# Altium PCB Main_board.PcbDoc (part 1 of 2)
Units mm, origin at the board's own origin, x right, y up, seen from the top; angles counter-clockwise.
Board outline 234.31 x 121 mm, 2 copper layers (Top Layer, Bottom Layer); 208 components, 182 nets, 717 pads, 564 vias.
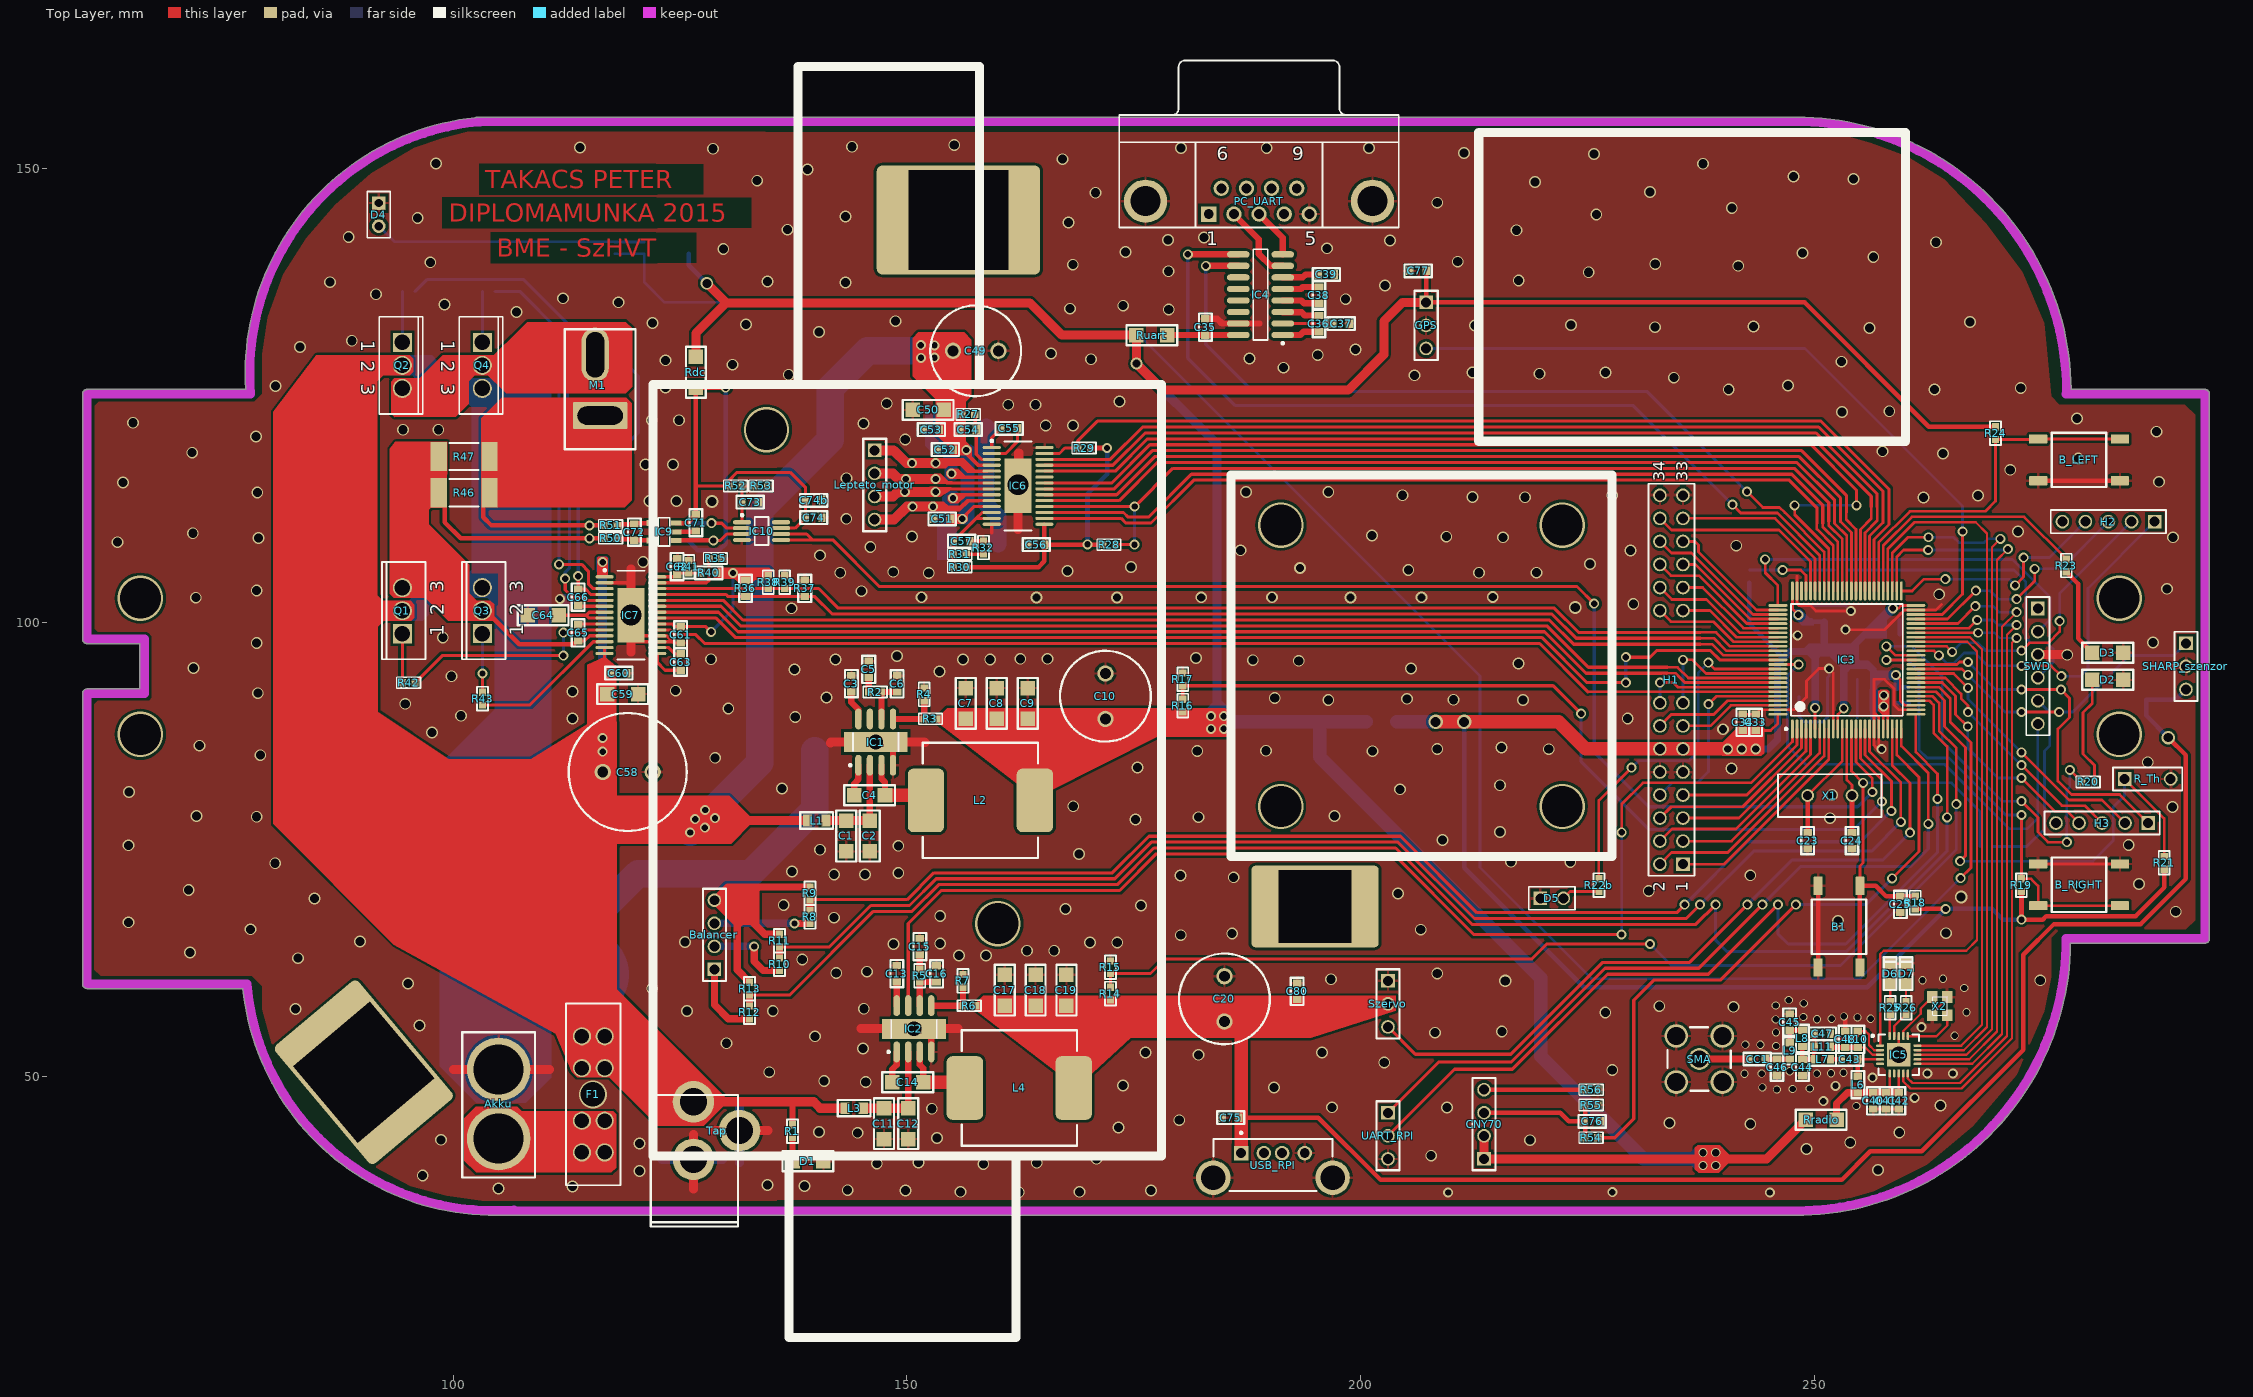
[diagram p0: Top Layer view]
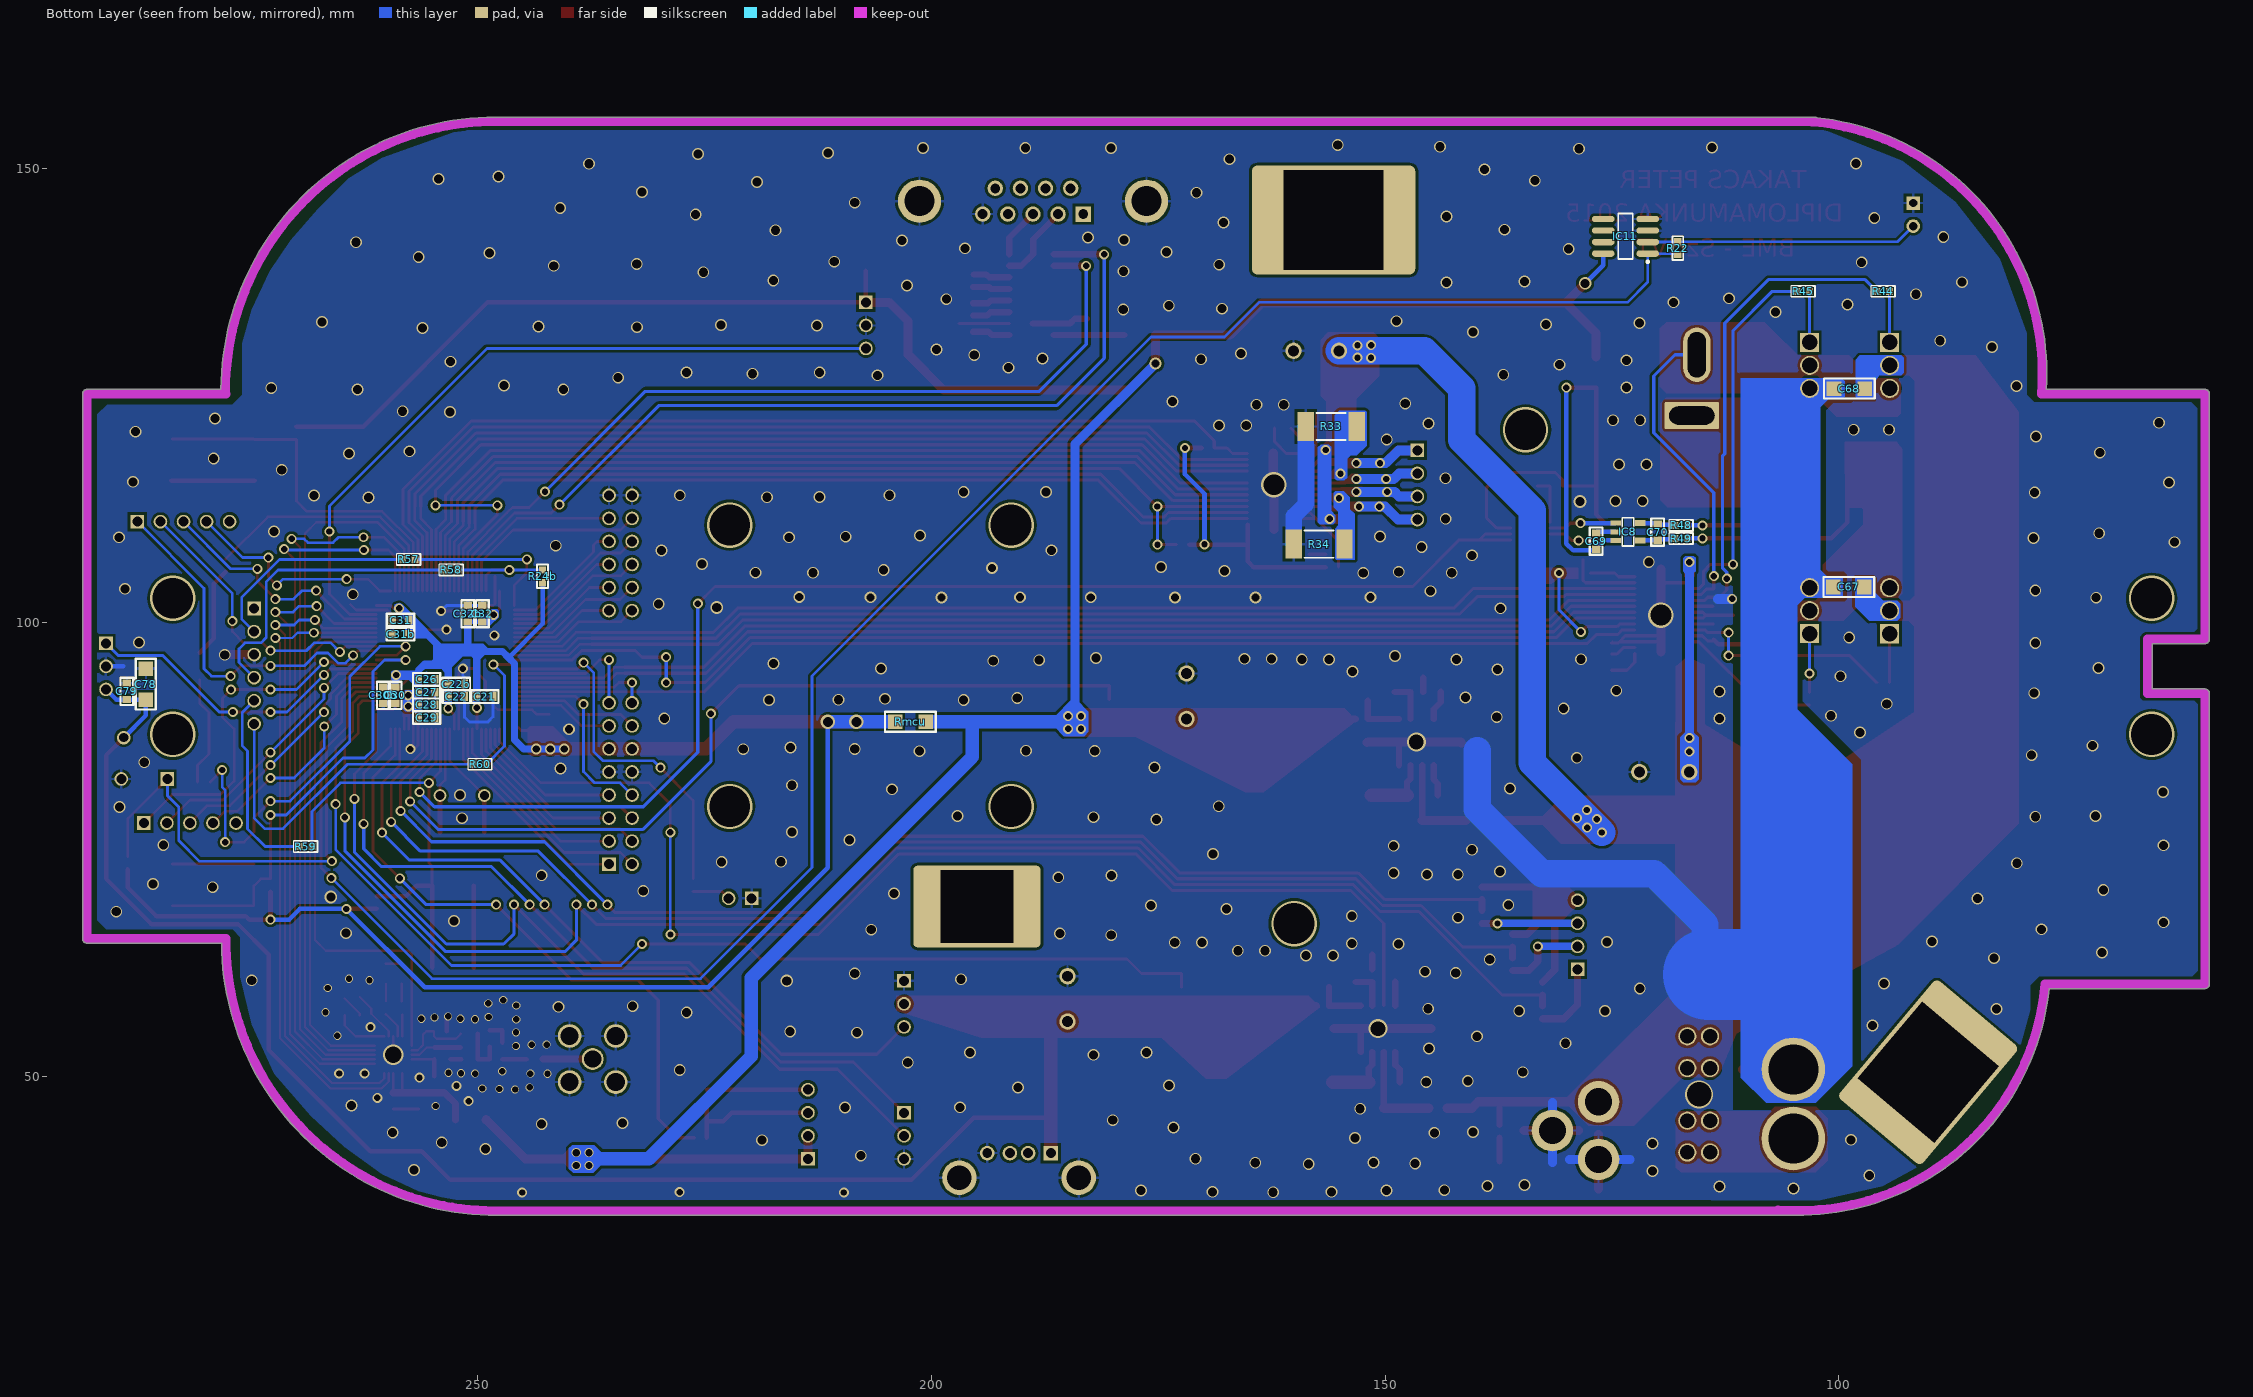
[diagram p1: Bottom Layer view, seen from below]

## Layer stack, top to bottom
Top Solder: solder mask 0.0102, Solder Resist, Dk 3.5
Top Layer: signal copper 0.0356
Dielectric1: dielectric 0.32, FR-4, Dk 4.8
Bottom Layer: signal copper 0.0356
Bottom Solder: solder mask 0.0102, Solder Resist, Dk 3.5

## Board outline
59.686,59.707 cw(c59.686,60.207) 59.186,60.207 59.186,92.207 cw(c59.686,92.207) 59.686,92.707 65.5,92.707 65.5,97.707 59.686,97.707 cw(c59.686,98.207) 59.186,98.207 59.186,125.207 cw(c59.686,125.207) 59.686,125.707 77.171,125.707 cw(c105.417,127.497) 102.44,155.643 cw(c102.686,155.207) 102.686,155.707 248.023,155.707 cw(c248.023,125.472) 278.258,125.707 293,125.707 cw(c293,125.207) 293.5,125.207 293.5,65.207 cw(c293,65.207) 293,64.707 278.187,64.707 cw(c247.953,64.95) 248.744,34.725 cw(c248.61,35.207) 248.61,34.707 105,34.707 cw(c105,35.207) 104.824,34.739 cw(c104.497,62.537) 76.841,59.707

## Design rules (kind name [scope] priority, off if disabled: settings)
Clearance [All] p1: gap=0.3
Height [All] p1: minheight=0 maxheight=100 prefheight=12.7
PolygonConnect [IsVia AND InNet('GND')] p1: connectstyle=Direct reliefconductorwidth=0.3 reliefentries=4 polygonreliefangle="90 Angle" airgapwidth=0.3
PolygonConnect PolygonConnect_1 [All] p2: connectstyle=Relief reliefconductorwidth=0.3 reliefentries=4 polygonreliefangle="90 Angle" airgapwidth=0.3
RoutingVias [All] p1: holewidth=1 width=1.5 viastyle="Through Hole" minholewidth=0.7 minwidth=0.9 maxholewidth=100 maxwidth=110
SolderMaskExpansion [All] p1: expansion=0.102
Width [All] p1: maxlimit=100 minlimit=0.25 preferedwidth=0.254 minimp=50.000000 maximp=50.000000 favimp=50.000000
29 further rules are at their usual default settings.

## Classes and differential pairs
component class U_tapellatas: Akku Balancer C1 C2 C3 C4 C5 C6 C7 C8 C9 C10 C11 C12 C13 C14 C15 C16 C17 C18 C19 C20 D1 F1 IC1 IC2 L1 L2 L3 L4 R1 R2 R3 R4 R5 R6 R7 R8 R9 R10 R11 R12 R13 R14 R15 R16 R17 Rdc Rmcu Rradio Ruart Tap
component class U_Si4461: C44 C45 C46 C47 C48 C49 C50 C51 C52 CC1 D6 D7 IC6 L5 L6 L7 L8 L9 L10 R27 R30 SMA X2
component class U_PC_UART: C39 C41 C42 C43 C44 IC6 PC_UART
component class U_mikrokontroller: B1 B_LEFT B_RIGHT C21 C22 C23 C24 C26 C27 C28 C29 C30 C30b C31 C31b C32 C32b C33 C34 D2 D3 D4 D5 H1 H2 H3 IC3 IC11 R18 R19 R20 R21 R22 R22b R23 R24 R24b R_Th X1
component class U_lepteto_motor: C53 C54 C55 C56 C57 C58 C59 C60 C65 IC7 Lepteto_motor R29 R30 R31 R32 R33 R34 R35 R38
component class U_DC_motor: C58 C59 C60 C61 C62 C63 C64 C65 C66 C67 C68 C69 C70 C71 C72 C73 IC7 IC8 IC9 IC10 M1 Q1 Q2 Q3 Q4 R35 R36 R37 R38 R39 R40 R41 R42 R43 R44 R45 R46 R47 R48 R49 R50 R51 R52 R53
component class U_csatlakozok: C78 C79 C80 C81 C82 C85 CNY70 GPS R56 R57 R58 R59 R60 R61 R62 SHARP_szenzor SWD Szervo UART_RPI USB_RPI

## Components (designator, comment, footprint, x,y, rotation, side; value= is the part's Value field where it differs from the comment)
Akku "XT60" XT60 105.16,47.12 r0 top
B1 "SW-PB" "6x6 button" 252.69,66.52 r0 top
B_LEFT "SW-PB" "6x6 button" 279.13,117.944 r90 top
B_RIGHT "SW-PB" "6x6 button" 279.13,71.13 r270 top
Balancer "Balancer csatlakozó" FP_CONN4_TUSKE_254MM 128.8,61.81 r0 top
C1 "0805" FP_1206_CAP_125 143.33,76.51 r270 top
C2 "Cap" FP_1206_CAP_125 145.92,76.51 r270 top
C3 "Cap" FP_0603_CAP_080 143.89,93.29 r90 top
C4 "Cap" FP_1206_CAP_125 145.89,81 r0 top
C5 "" FP_0603_CAP_080 145.8,94.86 r90 top
C6 "" FP_0603_CAP_080 148.93,93.27 r90 top
C7 "6.3V" FP_1206_CAP_125 156.489,91.11 r90 top
C8 "6.3V" FP_1206_CAP_125 159.909,91.11 r90 top
C9 "Cap" FP_1206_CAP_125 163.32,91.11 r90 top
C10 "16V" power_cap_10mm 171.25,92.06 r0 top
C11 "0805" FP_1206_CAP_125 147.48,44.82 r270 top
C12 "Cap" FP_1206_CAP_125 150.15,44.82 r270 top
C13 "Cap" FP_0603_CAP_080 148.89,61.35 r90 top
C14 "Cap" FP_1206_CAP_125 150.09,49.38 r0 top
C15 "" FP_0603_CAP_080 151.42,64.33 r90 top
C16 "" FP_0603_CAP_080 153.27,61.32 r90 top
C17 "6.3V" FP_1206_CAP_125 160.78,59.53 r90 top
C18 "6.3V" FP_1206_CAP_125 164.18,59.53 r90 top
C19 "Cap" FP_1206_CAP_125 167.58,59.53 r90 top
C20 "16V" power_cap_10mm 184.36,58.71 r0 top
C21 "Cap" FP_0603_CAP_080 249.17,91.87 r180 bottom
C22 "Cap" FP_0603_CAP_080 252.32,91.87 r180 bottom
C22b "Cap" FP_0603_CAP_080 252.32,93.25 r180 bottom
C23 "Cap" FP_0603_CAP_080 249.237,76 r90 top
C24 "Cap" FP_0603_CAP_080 254.117,76 r90 top
C25 "Cap" FP_0603_CAP_080 259.44,68.97 r90 top
C26 "Cap" FP_0603_CAP_080 255.6,93.76 r0 bottom
C27 "Cap" FP_0603_CAP_080 255.6,92.36 r0 bottom
C28 "Cap" FP_0603_CAP_080 255.6,90.96 r0 bottom
C29 "Cap" FP_0603_CAP_080 255.6,89.56 r0 bottom
C30 "Cap" FP_0603_CAP_080 259.07,92.01 r270 bottom
C30b "Cap" FP_0603_CAP_080 260.36,92.01 r270 bottom
C31 "Cap" FP_0603_CAP_080 258.47,100.3 r0 bottom
C31b "Cap" FP_0603_CAP_080 258.47,98.75 r0 bottom
C32 "Cap" FP_0603_CAP_080 249.45,100.99 r90 bottom
C32b "Cap" FP_0603_CAP_080 251.06,100.99 r90 bottom
C33 "Cap" FP_0603_CAP_080 243.5,89.02 r90 top
C34 "Cap" FP_0603_CAP_080 242.1,89.02 r270 top
C35 "Cap" FP_0603_CAP_080 182.88,132.58 r270 top
C36 "Cap" FP_0603_CAP_080 195.4,132.95 r270 top
C37 "Cap" FP_0603_CAP_080 197.84,132.96 r180 top
C38 "Cap" FP_0603_CAP_080 195.4,136.09 r270 top
C39 "Cap" FP_0603_CAP_080 196.21,138.37 r180 top
C40 "Cap" FP_0603_CAP_080 256.469,47.33 r90 top
C41 "Cap" FP_0603_CAP_080 257.869,47.33 r90 top
C42 "Cap" FP_0603_CAP_080 259.269,47.33 r90 top
C43 "Cap" FP_0603_CAP_080 253.86,51.91 r180 top
C44 "Cap" FP_0603_CAP_080 248.66,51.01 r270 top
C45 "Cap" FP_0603_CAP_080 247.26,56.01 r90 top
C46 "Cap" FP_0603_CAP_080 245.86,51.04 r270 top
C47 "Cap" FP_0603_CAP_080 250.86,54.71 r0 top
C48 "Cap" FP_0603_CAP_080 253.37,54.11 r270 top
C49 "16V" power_cap_10mm 157.73,130.58 r270 top
C50 "50V" FP_1206_CAP_125 152.34,123.45 r0 top
C51 "50V" FP_0603_CAP_080 153.875,111.44 r0 top
C52 "50V" FP_0603_CAP_080 154.24,119.07 r0 top
C53 "50V" FP_0603_CAP_080 152.69,121.28 r0 top
C54 "16V" FP_0603_CAP_080 156.74,121.29 r180 top
C55 "50V" FP_0603_CAP_080 161.27,121.42 r180 top
C56 "50V" FP_0603_CAP_080 164.25,108.61 r0 top
C57 "50V" FP_0603_CAP_080 156.03,108.99 r180 top
C58 "25V" power_cap_13mm 119.39,83.13 r0 top
C59 "Cap" FP_1206_CAP_125 118.69,92.14 r180 top
C60 "Cap" FP_0603_CAP_080 118.27,94.44 r180 top
C61 "Cap" FP_0603_CAP_080 125.074,98.671 r90 top
C62 "Cap" FP_0603_CAP_080 124.7,106.186 r270 top
C63 "Cap" FP_0603_CAP_080 125.074,95.676 r270 top
C64 "Cap" FP_1206_CAP_125 109.93,100.83 r0 top
C65 "Cap" FP_0603_CAP_080 113.79,98.89 r270 top
C66 "Cap" FP_0603_CAP_080 113.79,102.83 r90 top
C67 "Cap" FP_1206_CAP_125 98.91,103.94 r0 bottom
C68 "Cap" FP_1206_CAP_125 98.85,125.8 r0 bottom
C69 "Cap" FP_0603_CAP_080 126.76,108.99 r270 bottom
C70 "Cap" FP_0603_CAP_080 119.98,109.99 r90 bottom
C71 "Cap" FP_0603_CAP_080 126.76,111.02 r90 top
C72 "Cap" FP_0603_CAP_080 119.98,109.99 r270 top
C73 "Cap" FP_0603_CAP_080 132.74,113.28 r180 top
C74 "Cap" FP_0603_CAP_080 139.74,111.58 r0 top
C74b "Cap" FP_0603_CAP_080 139.74,113.47 r0 top
C75 "Cap" FP_0603_CAP_080 185.68,45.48 r0 top
C76 "Cap" FP_0603_CAP_080 225.49,45.08 r180 top
C77 "Cap" FP_0603_CAP_080 206.31,138.76 r180 top
C78 "Cap" FP_1206_CAP_125 286.52,93.24 r270 bottom
C79 "Cap" FP_0603_CAP_080 288.61,92.44 r90 bottom
C80 "Cap" FP_0603_CAP_080 193,59.39 r90 top
CC1 "Cap" FP_0603_CAP_080 243.66,51.94 r0 top
CNY70 "Tüskesor" FP_CONN4_TUSKE_254MM 213.58,40.94 r0 top
D1 "GREEN" FP_1206_CAP_160 139.1,40.67 r0 top
D2 "RED" FP_1206_CAP_085 282.3,93.707 r0 top
D3 "BLUE" FP_1206_CAP_085 282.3,96.707 r0 top
D4 "Photo Sensor" HDR1X2#1 91.82,146.23 r270 top
D5 "WhiteLED" HDR1X2#2 219.78,69.65 r0 top
D6 "GREEN" FP_0805_LED_GREEN 258.32,60.35 r90 top
D7 "ORANGE" FP_0805_LED_GREEN 260.08,60.35 r90 top
F1 "Fuse" autosarus_foglalat 115.29,47.91 r90 top
GPS "Tüskesor" FP_CONN3_TUSKE_254MM 207.2,135.3 r180 top
H1 "Header 17X2" HDR2X17 235.5,73.4 r90 top
H2 "Header 5" HDR1X5 287.45,111.137 r180 top
H3 "Header 5" HDR1X5 286.75,77.937 r180 top
IC1 "TPS54336DDAR" SOIC8_thermal_pad 146.41,86.99 r0 top
IC2 "TPS54336DDAR" SOIC8_thermal_pad 150.63,55.41 r0 top
IC3 "STM32F105VCT7" LQFP100 253.3,95.78 r90 top
IC4 "MAX3232" SOIC16 189.14,136.47 r180 top
IC5 "Si4461" QFN20_thermal_pad 259.14,52.41 r0 top
IC6 "DRV8825" TSSOP28_thermal_pad 162.25,115.33 r0 top
IC7 "A3941" TSSOP28_thermal_pad 119.6,101.09 r0 top
IC8 "INA196" FP_SOT23-5 123.25,110.02 r180 bottom
IC9 "INA196" FP_SOT23-5 123.25,110.02 r180 top
IC10 "INA152" MSOP-MS8_M 133.99,110.1 r0 top
IC11 "LM358" SO-8_M 123.52,142.57 r0 bottom
L1 "Ferrit bead" FP_0805_IND 140.07,78.21 r0 top
L2 "Inductor" power_inductor 158.23,80.81 r0 top
L3 "Ferrit bead" FP_0805_IND 144.19,46.52 r0 top
L4 "Inductor" power_inductor 162.51,49.13 r0 top
L6 "Inductor" FP_0603_CAP_080 254.76,49.13 r90 top
L7 "Inductor" FP_0603_CAP_080 250.86,51.91 r0 top
L8 "Inductor" FP_0603_CAP_080 248.66,54.21 r270 top
L9 "Inductor" FP_0603_CAP_080 247.26,52.84 r90 top
L10 "Inductor" FP_0603_CAP_080 254.77,54.11 r270 top
L11 "Inductor" FP_0603_CAP_080 250.86,53.31 r0 top
Lepteto_motor "Tüskesor" FP_CONN4_TUSKE_254MM 146.45,118.99 r180 top
M1 "T csatlakozó" T-csatlakozo 116.31,125.65 r0 top
PC_UART "DB9 ANYA" DB9_connector 188.93,149.27 r0 top
Q1 "IRL7833" TO220AB 94.41,101.385 r180 top
Q2 "IRL7833" TO220AB 94.44,128.295 r0 top
Q3 "IRL7833" TO220AB 103.21,101.395 r180 top
Q4 "IRL7833" TO220AB 103.25,128.295 r0 top
R1 "Res1" FP_0603_RES 137.4,43.99 r90 top
R2 "Res1" FP_0603_RES 146.5,92.37 r0 top
R3 "Res1" FP_0603_RES 152.6,89.41 r180 top
R4 "Res1" FP_0603_RES 151.9,92.11 r270 top
R5 "Res1" FP_0603_RES 151.42,61.12 r270 top
R6 "Res1" FP_0603_RES 156.88,57.82 r180 top
R7 "Res1" FP_0603_RES 156.18,60.54 r270 top
R8 "Res1" FP_0603_RES 139.32,67.6 r270 top
R9 "Res1" FP_0603_RES 139.32,70.2 r270 top
R10 "Res1" FP_0603_RES 135.97,62.38 r270 top
R11 "Res1" FP_0603_RES 135.97,64.98 r270 top
R12 "Res1" FP_0603_RES 132.67,57.09 r270 top
R13 "Res1" FP_0603_RES 132.67,59.69 r270 top
R14 "Res1" FP_0603_RES 172.43,59.15 r270 top
R15 "Res1" FP_0603_RES 172.43,62.05 r270 top
R16 "Res1" FP_0603_RES 180.4,90.87 r270 top
R17 "Res1" FP_0603_RES 180.4,93.77 r270 top
R18 "Res Semi" FP_0603_RES 261.09,69.17 r90 top
R19 "Res Semi" FP_0603_RES 272.77,71.09 r270 top
R20 "Res1" FP_0603_RES 280.13,82.46 r0 top
R21 "Res1" FP_0603_RES 288.51,73.56 r90 top
R22 "Res1" FP_0603_RES 117.75,141.27 r270 bottom
R22b "Res1" FP_0603_RES 226.24,71.1 r90 top
R23 "Res1" FP_0603_RES 277.73,106.307 r90 top
R24 "Res Semi" FP_0603_RES 269.93,120.9 r270 top
R24b "Res Semi" FP_0603_RES 242.82,105.12 r270 bottom
R25 "Res1" FP_0603_RES 258.32,57.58 r270 top
R26 "Res1" FP_0603_RES 260.08,57.58 r270 top
R27 "Res1" FP_0603_RES 156.78,122.95 r0 top
R28 "Res Semi" FP_0603_RES 172.27,108.61 r180 top
R29 "Res Semi" FP_0603_RES 169.52,119.25 r0 top
R30 "Res Semi" FP_0603_RES 155.84,106.14 r0 top
R31 "Res Semi" FP_0603_RES 155.84,107.54 r180 top
R32 "Res Semi" FP_0603_RES 158.44,108.29 r270 top
R33 "2512" RES_2512 155.63,121.66 r180 bottom
R34 "2512" RES_2512 156.96,108.69 r180 bottom
R35 "1us" FP_0603_RES 128.92,107.09 r180 top
R36 "Res1" FP_0603_CAP_080 132.22,103.78 r90 top
R37 "Res1" FP_0603_CAP_080 138.75,103.781 r270 top
R38 "Res1" FP_0603_RES 134.73,104.47 r90 top
R39 "Res1" FP_0603_RES 136.54,104.47 r270 top
R40 "Res1" FP_0603_CAP_080 128.19,105.49 r0 top
R41 "Res1" FP_0603_RES 125.979,106.171 r270 top
R42 "Res1" FP_0603_RES 95.12,93.405 r0 top
R43 "Res1" FP_0603_RES 103.25,91.645 r270 top
R44 "Res1" FP_0603_RES 95.13,136.505 r180 bottom
R45 "Res1" FP_0603_RES 103.95,136.505 r180 bottom
R46 "Res1" RES_2512 101.53,114.36 r0 top
R47 "Res1" RES_2512 101.53,118.35 r0 top
R48 "Res1" FP_0603_RES 117.38,110.72 r180 bottom
R49 "Res1" FP_0603_RES 117.39,109.28 r180 bottom
R50 "Res1" FP_0603_RES 117.38,109.3 r180 top
R51 "Res1" FP_0603_RES 117.38,110.72 r180 top
R52 "Res1" FP_0603_RES 131.14,115.07 r180 top
R53 "Res1" FP_0603_RES 133.96,115.07 r180 top
R54 "Res1" FP_0603_RES 225.4,43.27 r0 top
R55 "Res1" FP_0603_RES 225.41,46.87 r180 top
R56 "Res1" FP_0603_RES 225.41,48.55 r180 top
R57 "Res1" FP_0603_RES 257.58,106.98 r180 bottom
R58 "Res1" FP_0603_RES 252.86,105.82 r180 bottom
R59 "Res1" FP_0603_RES 268.93,75.35 r180 bottom
R60 "Res1" FP_0603_RES 249.71,84.41 r180 bottom
R_Th "Res Thermal" HDR1X3#1 284.15,82.79 r0 top
Rdc "Res1" FP_1206_RES 126.76,127.6 r90 top
Rmcu "Res1" FP_1206_RES 202.29,89.09 r180 bottom
Rradio "Res1" FP_1206_RES 250.72,45.25 r180 top
Ruart "Res1" FP_1206_RES 176.99,131.68 r180 top
SHARP_szenzor "Tüskesor" HDR1X3#2 290.91,97.74 r270 top
SMA "SMA csatlakozó" SMA_connector 237.3,51.94 r270 top
SWD "Tüskesor" HDR1X6 274.59,101.57 r270 top
Szervo "Tüskesor" FP_CONN3_TUSKE_254MM 203,60.56 r180 top
Tap "Tapcsatlakozo" FP_DC_TAP_ANYA 126.49,47.23 r180 top
UART_RPI "Tüskesor" FP_CONN3_TUSKE_254MM 203,46.02 r180 top
USB_RPI "USB csatlakozó ANYA" USB_vertical 190.84,40.12 r270 top
X1 "8MHz" crystal_furatszerelt 251.92,80.96 r0 top
X2 "30 MHz" crystal_sx2520 263.789,57.87 r0 top

## Footprints (in the part's own frame and the unit in brackets; to place one, negate y for a bottom-side part, rotate by r counter-clockwise, add the part's x,y. Pads: shape width x height; smd on the part's side, far side on the other; paste and mask are expansions set on the pad)
"6x6 button" [mm] "SMD"
  rrect10% 1x2 smd mask+0.2: 1(-2.3,-4.5) 1(-2.3,4.5) 2(2.3,-4.5) 2(2.3,4.5)
  silkscreen extent -3,-3 3,3
autosarus_foglalat [mm] "biztositek_foglalat"
  round 2 hole 1.6: 1(-6.266,-1.419) 1(-6.266,1.081) 1(-2.766,-1.419) 1(-2.766,1.081) 2(3.034,-1.419) 2(3.034,1.081) 2(6.534,-1.419) 2(6.534,1.081)
  silkscreen extent -9.87,-3.17 10.13,2.83
crystal_furatszerelt [mm]
  round 1.4 hole 1: 1(2.197,0.007) 2(-2.683,0.007)
  silkscreen extent -5.94,-2.34 5.46,2.36
crystal_sx2520 [mm] "4_pin"
  rrect10% 1.2x1.3 smd mask+0.3: 1(0.818,-1.097) 2(0.818,0.903) 3(-0.832,0.903) 4(-0.832,-1.097)
  silkscreen extent -0.78,-1.1 0.82,0.9
DB9_connector [mm] "RS232"
  rect 1.69x1.69 hole 1.1: 1(-5.675,-4.251)
  round 1.69 hole 1.1: 2(-2.905,-4.251) 3(-0.135,-4.251) 4(2.635,-4.251) 5(5.405,-4.251) 6(-4.29,-1.411) 7(-1.52,-1.411) 8(1.25,-1.411) 9(4.02,-1.411)
  round 4.76 hole 3.3: 10(-12.63,-2.831) 11(12.36,-2.831)
  silkscreen extent -15.54,-5.73 15.26,12.67
FP_0603_CAP_080 [mm] "0.8mm magas 0603 kapacitás"
  rect 0.8x0.95 smd: 1(-0.9,0) 2(0.9,0)
  silkscreen extent -1.5,-0.7 1.5,0.7, body extent -0.8,-0.4 0.76,0.4, height 0.8
FP_0603_RES [mm] "0603 ellenállás"
  rect 0.8x0.8 smd: 1(-0.7,0) 2(0.7,0)
  silkscreen extent -1.3,-0.6 1.3,0.6, body extent -0.8,-0.4 0.8,0.4, height 0.44
FP_0805_IND [mm] "0805 power inductor"
  rect 1x1.3 smd: 1(-1,0) 2(1,0)
  silkscreen extent -1.8,-0.9 1.8,0.9, body extent -1,-0.64 1.03,0.64, height 1.25
FP_0805_LED_GREEN [mm] "0805 méretû zöld LED"
  rect 1.2x1.3 smd: A(-0.1,0) K(2.1,0)
  silkscreen extent -0.8,-0.7 2.8,0.7, body extent 0.01,-0.63 2.03,0.62, height 1.1
FP_1206_CAP_085 [mm] "1206 kapacitás 0.85 mm"
  rect 1.6x1.6 smd: 1(-1.7,0) 2(1.7,0)
  silkscreen extent -2.8,-1.1 2.8,1.1, body extent -1.52,-0.79 1.58,0.79, height 0.85
FP_1206_CAP_125 [mm] "1206 kapacitás 1.25 mm"
  rect 1.6x1.6 smd: 1(-1.7,0) 2(1.7,0)
  silkscreen extent -2.8,-1.1 2.8,1.1, body extent -1.52,-0.79 1.58,0.79, height 1.25
FP_1206_CAP_160 [mm] "1206 kapacitás 1.6mm magas"
  rect 1.6x1.6 smd: 1(-1.7,0) 2(1.7,0)
  silkscreen extent -2.8,-1.1 2.8,1.1, body extent -1.52,-0.79 1.58,0.79, height 1.6
FP_1206_RES [mm] "1206 ellenállás"
  rect 1.6x1.6 smd: 1(-1.7,0) 2(1.7,0)
  silkscreen extent -2.8,-1.1 2.8,1.1, body extent -1.6,-0.8 1.6,0.8, height 0.62
FP_CONN3_TUSKE_254MM [mm] "3×1 tüskesor"
  rect 1.5x1.5 hole 1.1: 1(0,0)
  round 1.5 hole 1.1: 2(0,2.54) 3(0,5.08)
  silkscreen extent -1.27,-1.27 1.27,6.35, body extent -1.27,-1.27 1.27,6.35, height 8.54
FP_CONN4_TUSKE_254MM [mm] "4×1 tüskesor"
  rect 1.5x1.5 hole 1.1: 1(0,0)
  round 1.5 hole 1.1: 2(0,2.54) 3(0,5.08) 4(0,7.62)
  silkscreen extent -1.27,-1.27 1.27,8.9, body extent -1.27,-1.27 1.27,8.89, height 8.54
FP_DC_TAP_ANYA [mil] "DC HEBA25 TÁPFESZÜLTSÉG ALJZAT ZÁRT, NYÁKBA 90°"
  round 180 hole 118.11: 1(0,0) 2(0,250) 3(-200,125)
  silkscreen extent -193,-30 185,541, body extent -190,-31 183,539, height 440
FP_SOT23-5 [mm] "SOT23, 5-Leads, Body 2.9x1.6mm, Pitch 0.95mm, Lead Span 2.8mm, IPC Medium Density"
  rect 1.2x0.55 smd mask+0.05: 1(-1.327,0.95) 2(-1.327,0) 3(-1.327,-0.95)
  rect 1.2x0.65 smd: 4(1.327,-0.95) 5(1.327,0.95)
  silkscreen extent -0.64,-1.55 0.64,1.55, body extent -1.17,-1.46 1.17,1.46, height 1
HDR1X2#1 [mm] "Connector; Header; 2 Position"
  rect 1.5x1.5 hole 0.9: 1(0,0)
  round 1.5 hole 0.9: 2(2.54,0)
  silkscreen extent -1.27,-1.27 3.81,1.27
HDR1X2#2 [mm] "Connector; Header; 2 Position"
  rect 1.5x1.5 hole 1.1: 1(0,0)
  round 1.5 hole 1.1: 2(2.54,0)
  silkscreen extent -1.27,-1.27 3.81,1.27
HDR1X3#1 [mm] "Connector; Header; 3 Position"
  rect 1.5x1.5 hole 1.1: 1(0,0)
  round 1.5 hole 1.1: 3(5.08,0)
  silkscreen extent -1.27,-1.27 6.35,1.27
HDR1X3#2 [mm] "Connector; Header; 3 Position"
  rect 1.5x1.5 hole 1.1: 1(0,0)
  round 1.5 hole 1.1: 2(2.54,0) 3(5.08,0)
  silkscreen extent -1.27,-1.27 6.35,1.27
HDR1X5 [mm] "Connector; Header; 5 Position"
  rect 1.5x1.5 hole 1.1: 1(0,0)
  round 1.5 hole 1.1: 2(2.54,0) 3(5.08,0) 4(7.62,0) 5(10.16,0)
  silkscreen extent -1.27,-1.27 11.43,1.27
HDR1X6 [mm] "Connector; Header; 6 Position"
  rect 1.5x1.5 hole 1.1: 1(0,0)
  round 1.5 hole 1.1: 2(2.54,0) 3(5.08,0) 4(7.62,0) 5(10.16,0) 6(12.7,0)
  silkscreen extent -1.27,-1.27 13.97,1.27
HDR2X17 [mm] "Connector; Header; 17x2 Position"
  rect 1.5x1.5 hole 1.1: 1(0,0)
  round 1.5 hole 1.1: 2(0,2.54) 3(2.54,0) 4(2.54,2.54) 5(5.08,0) 6(5.08,2.54) 7(7.62,0) 8(7.62,2.54) 9(10.16,0) 10(10.16,2.54) 11(12.7,0) 12(12.7,2.54) 13(15.24,0) 14(15.24,2.54) 15(17.78,0) 16(17.78,2.54) 23(27.94,0) 24(27.94,2.54) 25(30.48,0) 26(30.48,2.54) 27(33.02,0) 28(33.02,2.54) 29(35.56,0) 30(35.56,2.54) 31(38.1,0) 32(38.1,2.54) 33(40.64,0) 34(40.64,2.54)
  silkscreen extent -1.27,-1.27 41.91,3.81
LQFP100 [mm]
  oval 2.1x0.3 smd: 1(-7.473,5.746) 2(-7.473,5.246) 3(-7.473,4.746) 4(-7.473,4.246) 5(-7.473,3.746) 6(-7.473,3.246) 7(-7.473,2.746) 8(-7.473,2.246) 9(-7.473,1.746) 10(-7.473,1.246) 11(-7.473,0.746) 12(-7.473,0.246) 13(-7.473,-0.254) 14(-7.473,-0.754) 15(-7.473,-1.254) 16(-7.473,-1.754) 17(-7.473,-2.254) 18(-7.473,-2.754) 19(-7.473,-3.254) 20(-7.473,-3.754) 21(-7.473,-4.254) 22(-7.473,-4.754) 23(-7.473,-5.254) 24(-7.473,-5.754) 25(-7.473,-6.254) 51(7.727,-6.254) 52(7.727,-5.754) 53(7.727,-5.254) 54(7.727,-4.754) 55(7.727,-4.254) 56(7.727,-3.754) 57(7.727,-3.254) 58(7.727,-2.754) 59(7.727,-2.254) 60(7.727,-1.754) 61(7.727,-1.254) 62(7.727,-0.754) 63(7.727,-0.254) 64(7.727,0.246) 65(7.727,0.746) 66(7.727,1.246) 67(7.727,1.746) 68(7.727,2.246) 69(7.727,2.746) 70(7.727,3.246) 71(7.727,3.746) 72(7.727,4.246) 73(7.727,4.746) 74(7.727,5.246) 75(7.727,5.746)
  oval 0.3x2.1 smd: 26(-5.873,-7.854) 27(-5.373,-7.854) 28(-4.873,-7.854) 29(-4.373,-7.854) 30(-3.873,-7.854) 31(-3.373,-7.854) 32(-2.873,-7.854) 33(-2.373,-7.854) 34(-1.873,-7.854) 35(-1.373,-7.854) 36(-0.873,-7.854) 37(-0.373,-7.854) 38(0.127,-7.854) 39(0.627,-7.854) 40(1.127,-7.854) 41(1.627,-7.854) 42(2.127,-7.854) 43(2.627,-7.854) 44(3.127,-7.854) 45(3.627,-7.854) 46(4.127,-7.854) 47(4.627,-7.854) 48(5.127,-7.854) 49(5.627,-7.854) 50(6.127,-7.854) 76(6.127,7.346) 77(5.627,7.346) 78(5.127,7.346) 79(4.627,7.346) 80(4.127,7.346) 81(3.627,7.346) 82(3.127,7.346) 83(2.627,7.346) 84(2.127,7.346) 85(1.627,7.346) 86(1.127,7.346) 87(0.627,7.346) 88(0.127,7.346) 89(-0.373,7.346) 90(-0.873,7.346) 91(-1.373,7.346) 92(-1.873,7.346) 93(-2.373,7.346) 94(-2.873,7.346) 95(-3.373,7.346) 96(-3.873,7.346) 97(-4.373,7.346) 98(-4.873,7.346) 99(-5.373,7.346) 100(-5.873,7.346)
  silkscreen extent -7.6,-6.4 6.28,6.57, body extent -6.87,-7.25 7.13,6.75, height 1.6
MSOP-MS8_M [mm] "TSOP, 8-Leads, Body 3x3mm, Pitch 0.65mm, IPC Low Density"
  oval 2x0.45 smd: 1(-2.15,0.975) 2(-2.15,0.325) 3(-2.15,-0.325) 4(-2.15,-0.975) 5(2.15,-0.975) 6(2.15,-0.325) 7(2.15,0.325) 8(2.15,0.975)
  silkscreen extent -2.27,-1.55 0.75,1.87, body extent -1.6,-1.6 1.6,1.6, height 1.1
power_cap_10mm [mm] "10mm"
  round 1.8 hole 1.2 mask+0.3: 1(0.625,-2.647) 2(0.625,2.353)
  silkscreen extent -4.37,-5.15 5.62,4.85
power_cap_13mm [mm]
  round 1.8 hole 1.2 mask+0.3: 1(-2.896,0.426) 2(2.604,0.426)
  silkscreen extent -6.65,-6.07 6.35,6.93
power_inductor [mm]
  rrect30% 4x7 smd mask+0.3: 1(-6.127,-0.381) 2(5.873,-0.381)
  silkscreen extent -6.48,-6.73 6.22,5.97
QFN20_thermal_pad [mm]
  oval 0.9x0.25 smd: 1(-1.923,1) 2(-1.923,0.5) 3(-1.923,0) 4(-1.923,-0.5) 5(-1.923,-1) 11(2.177,-1) 12(2.177,-0.5) 13(2.177,0) 14(2.177,0.5) 15(2.177,1)
  oval 0.25x0.9 smd: 6(-0.873,-2.05) 7(-0.373,-2.05) 8(0.127,-2.05) 9(0.627,-2.05) 10(1.127,-2.05) 16(1.127,2.05) 17(0.627,2.05) 18(0.127,2.05) 19(-0.373,2.05) 20(-0.873,2.05)
  rect 2.6x2.6 smd: 21(0.127,0)
  silkscreen extent -2.87,-2.23 2.35,2.22, body extent -1.95,-2.07 2.2,2.07, height 1
RES_2512 [mm]
  rect 1.8x3.2 smd: 1(-3.114,-0.035) 2(2.486,-0.035)
  silkscreen extent -1.91,-1.54 1.29,1.46
SMA_connector [mm]
  round 2.4 hole 1.9 mask+0.3: 1(0,0)
  round 2.6 hole 2 mask+0.3: 2(-2.54,-2.54) 2(-2.54,2.54) 2(2.54,2.54) 2(2.54,-2.54)
  silkscreen extent -3.5,-3.5 3.5,3.45
SO-8_M [mm] "SOIC, 8-Leads, Body 4.9x3.9mm, Pitch 1.27mm, IPC Low Density"
  oval 2.5x0.7 smd: 1(-2.45,1.905) 2(-2.45,0.635) 3(-2.45,-0.635) 4(-2.45,-1.905) 5(2.45,-1.905) 6(2.45,-0.635) 7(2.45,0.635) 8(2.45,1.905)
  silkscreen extent -2.57,-2.5 0.8,2.93, body extent -2,-2.5 2,2.5, height 1.75
SOIC8_thermal_pad [mm]
  oval 0.7x2.3 smd: 1(-1.751,-2.689) 2(-0.481,-2.689) 3(0.789,-2.689) 4(2.059,-2.689) 5(2.059,2.411) 6(0.789,2.411) 7(-0.481,2.411) 8(-1.751,2.411)
  rect 7x2.2 smd: 9(0.154,-0.139)
  silkscreen extent -2.78,-2.81 2.65,0.86, body extent -2.35,-2.14 2.65,1.86, height 1.68
SOIC16 [mm]
  oval 2.5x0.7 smd: 1(-2.27,4.774) 2(-2.27,3.504) 3(-2.27,2.234) 4(-2.27,0.964) 5(-2.27,-0.306) 6(-2.27,-1.576) 7(-2.27,-2.846) 8(-2.27,-4.116) 9(2.63,-4.116) 10(2.63,-2.846) 11(2.63,-1.576) 12(2.63,-0.306) 13(2.63,0.964) 14(2.63,2.234) 15(2.63,3.504) 16(2.63,4.774)
  silkscreen extent -2.39,-4.67 0.98,5.8, body extent -1.82,-4.67 2.18,5.33, height 1.91
T-csatlakozo [mm] "motor_connector"
  rrect10% 6x3 hole 2 slot 5 at 0 deg: 1(-0.102,-2.825)
  oval 3x6 hole 2 slot 5 at 90 deg: 2(-0.652,3.875)
  silkscreen extent -4,-6.53 3.8,6.67
TO220AB [mm]
  rect 2.1x2.1 hole 1.7: 1(-0.022,2.598)
  round 2.1 hole 1.7: 2(-0.022,0.058) 3(-0.022,-2.482)
  silkscreen extent -2.57,-5.29 2.23,5.41
TSSOP28_thermal_pad [mm]
  oval 2x0.35 smd: 1(-2.9,3.971) 2(-2.9,3.321) 3(-2.9,2.671) 4(-2.9,2.021) 5(-2.9,1.371) 6(-2.9,0.721) 7(-2.9,0.071) 8(-2.9,-0.579) 9(-2.9,-1.229) 10(-2.9,-1.879) 11(-2.9,-2.529) 12(-2.9,-3.179) 13(-2.9,-3.829) 14(-2.9,-4.479) 15(2.9,-4.479) 16(2.9,-3.829) 17(2.9,-3.179) 18(2.9,-2.529) 19(2.9,-1.879) 20(2.9,-1.229) 21(2.9,-0.579) 22(2.9,0.071) 23(2.9,0.721) 24(2.9,1.371) 25(2.9,2.021) 26(2.9,2.671) 27(2.9,3.321) 28(2.9,3.971)
  rect 3x6 smd: 29(0,-0.254)
  silkscreen extent -3.02,-5.15 1.5,4.82, body extent -2.25,-5.15 2.25,4.65, height 1.1
USB_vertical [mm]
  rect 1.6x1.6 hole 1.1: 1(-1.455,-4.008)
  round 1.6 hole 1.1: 2(-1.455,-1.508) 3(-1.455,0.492) 4(-1.455,2.992)
  round 3.8 hole 2.7: 5(1.255,6.062) 6(1.255,-7.078)
  silkscreen extent -3.8,-7.08 2.74,6.06, body extent -3.03,-7.08 2.74,6.06, height 15
XT60 [mm] "akkumulator_connector"
  round 7 hole 5.5: 1(-0.127,3.683) 2(-0.127,-3.937)
  silkscreen extent -4.13,-8.24 3.87,7.76

## Part data
Akku D5: library part "Header 2", "Header, 2-Pin"
B1 B_LEFT B_RIGHT: "Switch"
Balancer CNY70 Lepteto_motor: library part "Header 4", "Header, 4-Pin"
C1 C5 C6 C7 C8 C11 C15 C16 C17 C18 C50 C51 C52 C53 C54 C55 C56 C57: library part Cap, "Capacitor"
C2 C3 C4 C9 C12 C13 C14 C19 C21 C22 C22b C23 C24 C25 C26 C27 C28 C29 C30 C30b C31 C31b C32 C32b C33 C34 C35 C36 C37 C38 C39 C40 C41 C42 C43 C44 C45 C46 C47 C48 C59 C60 C61 C62 C63 C64 C65 C66 C67 C68 C69 C70 C71 C72 C73 C74 C74b C75 C76 C77 C78 C79 C80 CC1: "Capacitor"
C10 C20 C49 C58: library part "Cap Pol1", "Polarized Capacitor (Radial)"
D1 D2 D3: library part LED0, "Typical INFRARED GaAs LED"
D4: library part "Photo Sen", "Photosensitive Diode"
D6 D7: library part LED, "Typical RED GaAs LED"
F1: library part "Fuse 1"
GPS SHARP_szenzor Szervo Tap UART_RPI: library part "Header 3", "Header, 3-Pin"
H1: "Header, 17-Pin, Dual row"
H2 H3: "Header, 5-Pin"
IC1 IC2: library part TPS54336
IC3: library part STM32F105xx
L1 L3: library part Inductor, "Inductor"
M1: library part Motor, "Motor, General Kind"
PC_UART: library part "D Connector 9", "Receptacle Assembly, 9 Position, Right Angle"
Q1 Q2 Q3 Q4: library part NMOS-2, "N-Channel Power MOSFET"
R1 R2 R3 R4 R5 R6 R7 R8 R9 R10 R11 R12 R13 R14 R15 R16 R17 R20 R21 R22 R22b R23 R25 R26 R36 R37 R38 R39 R40 R41 R42 R43 R44 R45 R46 R47 R48 R49 R50 R51 R52 R53 R54 R55 R56 R57 R58 R59 R60 Rdc Rmcu Rradio Ruart: "Resistor"
R18 R19 R24 R24b R28 R29 R30 R31 R32: "Semiconductor Resistor"
R27 R33 R34: library part "Res Semi", "Semiconductor Resistor"
R35: library part Res1, "Resistor"
R_Th: "Thermistor"
SMA: library part "Header 5", "Header, 5-Pin"
SWD USB_RPI: library part "Header 6", "Header, 6-Pin"
X1 X2: library part XTAL, "Crystal Oscillator"

## Free pads (board coordinates)
  rrect10% 17x12 hole 11 square rot 130: ""(90.17,50.48)
  rrect10% 18x12 hole 11 square: ""(155.68,144.37)
  rrect10% 14x9 hole 8 square: ""(194.97,68.74)

## Via types
v1: diameter 1.3, hole 1, Top Layer to Bottom Layer, 338 vias
v2: diameter 1.1, hole 0.7, Top Layer to Bottom Layer, 154 vias
v3: diameter 0.9, hole 0.7, Top Layer to Bottom Layer, 30 vias
v4: diameter 1.3, hole 0.9, Top Layer to Bottom Layer, 11 vias
v5: diameter 5, hole 4.5, Top Layer to Bottom Layer, 10 vias
v6: diameter 1.4, hole 1, Top Layer to Bottom Layer, 5 vias
v7: diameter 1, hole 0.8, Top Layer to Bottom Layer, 4 vias
v8: diameter 1.2, hole 0.8, Top Layer to Bottom Layer, 3 vias
v9: diameter 1.6, hole 1.1, Top Layer to Bottom Layer, 2 vias
v10: diameter 2.8, hole 2.3, Top Layer to Bottom Layer, 2 vias
v11: diameter 2.1, hole 1.6, Top Layer to Bottom Layer, 2 vias
v12: diameter 3.1, hole 2.7, Top Layer to Bottom Layer, 1 vias
v13: diameter 2.3, hole 1.8, Top Layer to Bottom Layer, tented top, 1 vias
v14: diameter 1.5, hole 1, Top Layer to Bottom Layer, 1 vias

## Nets (pads, with @x,y where several pads share a name; then routed paths per layer and width w, separated by ;. In a path a pad name is that pad's centre, name@x,y a point inside that pad or via, vN(x,y) a via of type N, cw(c..) or ccw(c..) an arc to the next point about the centre after c; other vN are vias at no path point)
1V65V: C73.2 IC10.1 R52.1 R53.2 | length 5.4
  Top Layer w0.3: IC10.1@131.84,111.075 R52.1@131.84,115.07
  Top Layer w0.35: R52.1@131.84,115.07 R53.2@133.26,115.07
2: H1.7 IC3.2 | length 16.6
  Top Layer w0.3: H1.7@235.5,81.02 242.52,81.02 248.054,86.554 IC3.2@248.054,88.307
3: H1.6 IC3.3 | length 20.9
  Top Layer w0.3: H1.6@232.96,78.48 234.21,79.73 242.08,79.73 248.554,86.204 IC3.3@248.554,88.307
3V3: C7.1 C8.1 C9.1 C10.1 C77.1 CNY70.1 CNY70.2 GPS.1 IC11.8 L2.2 R3.1 R16.2 R24.1 Rdc.2 Rmcu.2 Rradio.2 Ruart.2 | length 363.4
  Top Layer w0.5: C77.1@207.2,138.75 GPS.1@207.2,135.3 248.89,135.3 262.59,121.6 R24.1@269.93,121.6
  Top Layer w0.8: R3.1@153.3,89.41 C9.1@163.32,89.41 C10.1@171.872,89.41
  Top Layer w1: Rdc.2@126.76,129.3 126.76,131.87 130.12,135.23 ; v6(127.96,137.39) 130.12,135.23 ; GPS.1@207.2,135.3 204.63,135.3 202.54,133.21 202.54,129.55 198.61,125.62 178.23,125.62 v4(175.29,128.56) Ruart.2@175.29,131.68 167.09,131.68 163.54,135.23 130.12,135.23 ; CNY70.2@213.58,43.48 CNY70.1@213.58,40.94 244.71,40.94 Rradio.2@249.02,45.25
  Bottom Layer w0.5: IC11.8@125.97,140.665 125.97,139.38 v6(127.96,137.39)
  Bottom Layer w1: v4(175.29,128.56) 184.17,119.68 184.17,89.08
  Bottom Layer w1.5: 184.18,89.09 195.48,89.09 ; Rmcu.2@200.59,89.09 195.48,89.09 ; 238.32,40.94 231.14,40.94 219.84,52.24 219.84,60.86 195.48,85.22 195.48,89.09
  other v2: 183.51,88.31 184.91,88.31 183.51,89.71 184.91,89.71
  other v7: 237.71,40.22 239.11,40.22 237.71,41.62 239.11,41.62
3V3_DC: C69.2 C71.2 C74.1 C74b.1 IC8.3 IC9.3 IC10.7 R52.2 Rdc.1 | length 63.3
  Top Layer w0.35: 126.76,115.14 126.83,115.07 R52.2@130.44,115.07 130.44,115.72 131.29,116.57 137.14,116.57 138.84,114.87 C74.1@138.84,111.58 137.685,110.425 IC10.7@136.14,110.425
  Top Layer w0.5: IC9.3@124.577,110.97 125.81,110.97 C71.2@126.76,111.92 126.76,115.14 Rdc.1@126.76,125.9 v2(130.03,125.9)
  Bottom Layer w0.5: IC8.3@124.577,109.07 125.91,109.07 C69.2@126.76,108.22 ; C69.2@126.91,107.97 129.3,107.97 130.04,108.71 v2@130.04,125.9
3V3_MCU: C21.1 C22.1 C22b.1 C26.2 C27.2 C28.2 C29.2 C30.1 C30b.1 C31.1 C31b.1 C32.1 C32b.1 C33.1 C34.2 H1.11 H1.12 IC3.6 IC3.11 IC3.21 IC3.22 IC3.28 IC3.50 IC3.75 IC3.100 R18.1 R19.2 R21.1 R24b.2 Rmcu.1 | length 244.9
  Top Layer w0.3: C33.1@243.5,88.12 245.16,88.12 245.954,88.914 IC3.100@245.954,89.807 ; IC3.75@247.554,103.507 247.554,101.526 v2(248.2,100.88) ; IC3.6@250.054,88.307 v2@250.054,90.614 ; IC3.11@252.554,88.307 252.554,89.914 v2(253.21,90.57) ; IC3.21@257.554,88.307 257.554,90.064 ; v2(257.63,92.01) 257.63,90.14 258.054,89.716 IC3.22@258.054,88.307 ; v2(258.61,101.59) 259.22,101.59 259.537,101.907 IC3.50@261.154,101.907 ; v2(258.95,94.24) 259.43,93.76 259.43,91.43 259.953,90.907 IC3.28@261.154,90.907
  Top Layer w0.5: R18.1@261.09,68.47 v2(264.44,68.47) ; R19.2@272.79,70.37 v2(272.79,67.3) 275.12,67.3 275.51,67.69 285.36,67.69 288.51,70.84 R21.1@288.51,72.86
  Top Layer w1.5: v9(208.26,89.09) 221.79,89.09 224.78,86.1 H1.11@235.5,86.1 v8(240.43,86.1)
  Bottom Layer w0.5: v9(211.39,89.09) 211.39,73.01 224.56,59.84 255.81,59.84 v2(264.44,68.47) 269.58,68.47 270.75,67.3 v2(272.79,67.3) ; R24b.2@242.82,104.42 242.82,99.884 246.547,96.157 ; C32.1@249.52,100.09 251.05,100.09 C32b.1@251.06,100.09 ; C30.1@259.07,92.91 259.08,92.91 C30b.1@260.36,92.91
  Bottom Layer w0.8: v8(240.43,86.1) 244.89,86.1 245.9,87.11 245.9,95.51 246.547,96.157 247.23,96.84 250.21,96.84 ; v2@250.06,90.63 250.06,96.73 ; v2@250.1,90.63 v2@250.11,90.62 ; 250.1,96.73 250.21,96.84 ; 251.05,96.84 C32b.1@251.05,100.09 ; 253.18,96.56 252.98,96.76 ; v2(253.21,90.57) 253.21,96.56 ; C29.2@256.5,89.56 256.5,90.76 C28.2@256.5,90.96 C27.2@256.5,92.36 C26.2@256.5,93.76 256.5,94.74 255.8,95.44 254.46,95.44 253.14,96.76 252.98,96.76 ; 257.05,100.25 253.64,96.84 253.06,96.84 252.98,96.76 ; v2(258.95,94.24) 259.08,94.11 C30.1@259.08,92.91 ; 250.21,96.84 252.9,96.84 252.98,96.76
  Bottom Layer w1.5: Rmcu.1@203.99,89.09 v9(211.39,89.09)
  other v2: 250.06,90.62 257.61,90.79
  other v8: 241.97,86.09 243.51,86.08
3V3_RADIO: C40.2 C41.2 C42.2 IC5.6 IC5.8 L6.1 Rradio.1 | length 13
  Top Layer w0.25: C41.2@258.267,48.627 IC5.6@258.267,50.36 ; C42.2@259.267,48.232 IC5.8@259.267,50.36
  Top Layer w0.8: Rradio.1@252.42,45.25 252.42,47.03 253.62,48.23 C40.2@256.469,48.23 C41.2@257.869,48.23 C42.2@259.269,48.23
3V3_UART: C35.2 IC4.16 Ruart.1 | length 7.8
  Top Layer w0.7: Ruart.1@178.706,131.696 IC4.16@186.51,131.696
4: H1.5 IC3.4 | length 19.1
  Top Layer w0.3: H1.5@235.5,78.48 241.68,78.48 249.054,85.854 IC3.4@249.054,88.307
5: H1.4 IC3.5 | length 23.4
  Top Layer w0.3: H1.4@232.96,75.94 234.3,77.28 241.33,77.28 249.554,85.504 IC3.5@249.554,88.307
5V2: C17.1 C18.1 C19.1 C20.1 C75.2 C78.2 C79.1 C80.1 L4.2 R6.1 R14.2 SHARP_szenzor.3 Szervo.2 USB_RPI.1 | length 177.9
  Top Layer w0.5: C75.2@186.58,45.48 186.832,45.48 195.33,45.48 202.19,38.62 252.97,38.62 256.12,41.77 261.8,41.77 272.97,52.94 272.97,63.41 276.37,66.81 285.91,66.81 290.91,71.81 290.91,85.4 v14(288.96,87.35)
  Top Layer w0.8: R6.1@157.58,57.82 167.57,57.82 C19.1@167.58,57.83
  Top Layer w1.5: USB_RPI.1@186.832,41.575 186.832,45.48 186.832,55.988
  Bottom Layer w0.5: v14(288.96,87.35) 286.52,89.79 C78.2@286.52,91.54 C79.1@288.61,91.54 289.79,91.54 SHARP_szenzor.3@290.91,92.66
7: H1.3 IC3.7 | length 21.7
  Top Layer w0.3: H1.3@235.5,75.94 240.84,75.94 250.554,85.654 IC3.7@250.554,88.307
8: H1.2 IC3.8 | length 26
  Top Layer w0.3: H1.2@232.96,73.4 234.24,74.68 240.43,74.68 251.054,85.304 IC3.8@251.054,88.307
9: H1.1 IC3.9 | length 24.2
  Top Layer w0.3: H1.1@235.5,73.4 240,73.4 251.554,84.954 IC3.9@251.554,88.307
11V1: C49.1 C50.2 C51.2 C52.2 C53.2 C54.2 C58.1 C59.2 C60.2 C67.1 C68.1 F1.2 IC6.4 IC6.11 IC7.1 IC7.13 IC7.14 L1.1 L3.1 Q1.2 Q2.2 R1.2 R27.1 Tap.1 | length 145.8
  Top Layer w0.35: 116.7,94.57 IC7.14@116.7,96.611 IC7.13@116.7,97.261 ; v2@155.86,111.31 157.351,112.801 IC6.11@159.35,112.801
  Top Layer w0.7: R1.2@137.4,44.69 137.4,47.23
  Top Layer w1: 113.39,78.21 L1.1@139.07,78.21 ; Tap.1@126.49,47.23 137.4,47.23 139.74,47.23 140.45,46.52 L3.1@143.19,46.52
  Top Layer w1.5: Tap.1@126.49,47.23 Tap.1@126.49,47.391
  Bottom Layer w1: C58.1@116.48,83.571 v2(116.48,106.68)
  Bottom Layer w3: v2(126.13,76.9) 133.8,84.57 133.8,112.38 141.57,120.15 141.57,125.84 145.685,129.955 C49.1@155.083,129.955
  other v2: 127.74,77.43 126.68,78.37 128.86,78.47 127.77,79.37 116.48,85.8 116.48,87.3 156.11,111.44 156.55,119.04 151.56,129.18 153.04,129.2 153.05,130.56 151.54,130.58
33: H3.4 IC3.33 | length 26.9
  Top Layer w0.3: IC3.33@261.154,93.407 264.053,93.407 265.53,91.93 265.53,89.91 v2(266.87,88.57) ; v2(272.79,82.9) 276.44,79.25 277.817,79.25 H3.4@279.13,77.937
  Bottom Layer w0.3: v2(266.87,88.57) 266.87,86.22 270.19,82.9 v2(272.79,82.9)
34: H3.3 IC3.34 | length 27.9
  Top Layer w0.3: IC3.34@261.154,93.907 264.403,93.907 266.14,92.17 266.14,91.65 266.9,90.89 v2(266.9,90.15) ; v2(272.79,84.31) 272.794,84.31 277.254,79.85 279.757,79.85 H3.3@281.67,77.937
  Bottom Layer w0.3: v2(266.9,90.15) 272.74,84.31 v2(272.79,84.31)
35: H3.2 IC3.35 | length 30.6
  Top Layer w0.3: IC3.35@261.154,94.407 265.323,94.407 v2(266.9,92.83) ; v2(272.79,85.73) 278.04,80.48 281.667,80.48 H3.2@284.21,77.937
  Bottom Layer w0.3: v2(266.9,92.83) 266.9,91.62 v2(272.79,85.73)
37: H3.1 IC3.37 | length 40.2
  Top Layer w0.3: IC3.37@261.154,95.407 265.687,95.407 265.95,95.67 v2(266.9,95.67) ; v2(272.79,92.64) v2@277.14,92.64 ; v2(277.14,92.63) 278.085,91.685 278.085,89.585 276.79,88.29 276.79,82.579 278.289,81.08 283.607,81.08 H3.1@286.75,77.937
  Bottom Layer w0.3: v2(266.9,95.67) 269.93,92.64 v2(272.79,92.64)
40: H2.1 IC3.40 | length 40.6
  Top Layer w0.3: IC3.40@261.154,96.907 263.143,96.907 v2@263.68,96.37 ; v2(272.79,95.25) 276.05,95.25 v2(277.18,94.12)
  Bottom Layer w0.3: v2(263.68,96.41) 264.54,95.55 265.34,95.55 266.46,96.67 267.65,96.67 269.07,95.25 v2(272.79,95.25) ; v2(277.18,94.12) 279.3,94.12 280.11,94.93 280.11,103.797 H2.1@287.45,111.137
41: H2.2 IC3.41 | length 33.1
  Top Layer w0.254: IC3.41@261.154,97.407 264.543,97.407 v2(265.16,96.79)
  Top Layer w0.3: v2(272.79,96.92) 273.66,97.79 275.75,97.79 277,99.04 v2(277,100.18)
  Bottom Layer w0.3: v2(265.16,96.79) 266.18,97.81 267.96,97.81 268.85,96.92 v2(272.79,96.92) ; v2(277,100.18) 277,103.227 H2.2@284.91,111.137
47: H2.3 IC3.47 | length 27.2
  Top Layer w0.3: IC3.47@261.154,100.407 264.647,100.407 v2(267.77,103.53) ; v2(272.26,102.6) 274.25,104.59 v2(274.25,105.94)
  Bottom Layer w0.3: v2(267.77,103.53) 269.31,103.53 270.24,102.6 v2(272.26,102.6) ; v2(274.25,105.94) 277.173,105.94 H2.3@282.37,111.137
51: H2.4 IC3.51 | length 25.3
  Top Layer w0.3: IC3.51@259.554,103.507 260.747,103.507 262.04,104.8 v2(264.41,104.8) ; v2(272.1,104.12) 273.02,105.04 v2(273.02,107.18)
  Bottom Layer w0.3: v2(264.41,104.8) 271.42,104.8 v2(272.1,104.12) ; v2(273.02,107.18) 275.873,107.18 H2.4@279.83,111.137
70: H1.31 IC3.70 | length 20
  Top Layer w0.3: H1.31@235.5,111.5 245.64,111.5 250.054,107.086 IC3.70@250.054,103.507
71: H1.32 IC3.71 | length 21.8
  Top Layer w0.3: H1.32@232.96,111.5 234.23,110.23 246.06,110.23 249.554,106.736 IC3.71@249.554,103.507
77: H1.29 IC3.77 | length 14
  Top Layer w0.3: H1.29@235.5,108.96 236.81,108.96 237.21,108.56 237.21,107.79 243.593,101.407 IC3.77@245.954,101.407
78: H1.30 IC3.78 | length 16.3
  Top Layer w0.3: H1.30@232.96,108.96 234.23,107.69 236.44,107.69 243.223,100.907 IC3.78@245.954,100.907
79: H1.27 IC3.79 | length 12.9
  Top Layer w0.3: H1.27@235.5,106.42 236.86,106.42 242.873,100.407 IC3.79@245.954,100.407
80: H1.28 IC3.80 | length 15.7
  Top Layer w0.3: H1.28@232.96,106.42 234.19,105.19 237.24,105.19 242.523,99.907 IC3.80@245.954,99.907
81: H1.25 IC3.81 | length 12.3
  Top Layer w0.3: H1.25@235.5,103.88 237.67,103.88 242.143,99.407 IC3.81@245.954,99.407
82: H1.26 IC3.82 | length 15.1
  Top Layer w0.3: H1.26@232.96,103.88 234.27,102.57 238.08,102.57 241.743,98.907 IC3.82@245.954,98.907
83: H1.23 IC3.83 | length 11.7
  Top Layer w0.3: H1.23@235.5,101.34 238.46,101.34 241.393,98.407 IC3.83@245.954,98.407
84: H1.24 IC3.84 | length 14.4
  Top Layer w0.3: H1.24@232.96,101.34 234.18,100.12 238.83,100.12 241.043,97.907 IC3.84@245.954,97.907
91: H1.15 IC3.91 | length 15.8
  Top Layer w0.3: v2(235.5,95.91) 236.55,95.91 238.053,94.407 IC3.91@245.954,94.407
  Bottom Layer w0.3: H1.15@235.5,91.18 v2(235.5,95.91) v2@235.5,95.92
94: H1.16 IC3.94 | length 15.4
  Top Layer w0.3: v2(232.96,93.41) 234.42,93.41 234.923,92.907 IC3.94@245.954,92.907
  Bottom Layer w0.3: H1.16@232.96,91.18 v2(232.96,93.41)
96: H1.8 IC3.96 | length 21.9
  Top Layer w0.3: v2(238.31,91.04) 239.177,91.907 IC3.96@245.954,91.907
  Bottom Layer w0.3: H1.8@232.96,81.02 234.3,82.36 237.07,82.36 238.31,83.6 v2(238.31,91.04)
97: H1.14 IC3.97 | length 14.1
  Top Layer w0.3: H1.14@232.96,88.64 234.21,89.89 238.89,89.89 240.407,91.407 IC3.97@245.954,91.407
98: H1.13 IC3.98 | length 11.4
  Top Layer w0.3: H1.13@235.5,88.64 238.52,88.64 240.787,90.907 IC3.98@245.954,90.907
+: M1.1 R46.2 R47.2 R48.2 R51.2 | length 17.9
  Top Layer w0.5: R46.2@103.35,114.15 103.35,111.61 104.24,110.72 v2(115.04,110.72) R51.2@116.68,110.72
  Bottom Layer w0.5: v2(115.04,110.72) R48.2@116.68,110.72
-: C65.2 IC7.11 Q1.3 Q3.2 R46.1 R47.1 R49.2 R50.2 | length 38.5
  Top Layer w0.35: C65.2@113.79,97.99 114.48,97.99 115.051,98.561 IC7.11@116.7,98.561
  Top Layer w0.5: R46.1@99.07,114.17 99.07,111.09 100.86,109.3 v2(115.04,109.3) R50.2@116.68,109.3 ; Q3.2@103.232,101.337 103.603,101.337 107.29,97.65 113.312,97.65 C65.2@113.79,98.128
  Bottom Layer w0.5: v2(115.04,109.3) R49.2@116.67,109.3
A+: IC6.5 Lepteto_motor.1 | length 21.2
  Top Layer w0.35: 156.47,117.59 157.359,116.701 IC6.5@159.35,116.701
  Top Layer w0.5: 153.95,117.59 156.47,117.59
  Top Layer w1: v2(153.18,117.59) 153.95,117.59
  Top Layer w1.1: Lepteto_motor.1@146.45,118.99 148.55,118.99 149.95,117.59 v2(153.18,117.59)
  Bottom Layer w1.1: Lepteto_motor.1@146.45,118.99 148.54,118.99 149.94,117.59 v2(153.18,117.59)
  other v2: 150.57,117.59
A-: IC6.7 Lepteto_motor.2 | length 20.3
  Top Layer w0.35: v2@153.18,115.79 154.05,115.79 154.439,115.401 IC6.7@159.35,115.401
  Top Layer w1.1: Lepteto_motor.2@146.45,116.45 148.45,116.45 149.06,115.84 v2(153.18,115.84)
  Bottom Layer w1.1: Lepteto_motor.2@146.45,116.45 148.45,116.45 149.06,115.84 v2(153.18,115.84)
  other v2: 149.88,115.84
AD_DC+: IC9.1 IC10.3 | length 7.6
  Top Layer w0.35: v2(128.68,109.07) 129.47,109.07 130.175,109.775 IC10.3@131.84,109.775
  Top Layer w0.5: IC9.1@124.577,109.07 v2(128.68,109.07)
AD_DC-: IC8.1 IC10.2 | length 7.5
  Top Layer w0.35: v2(128.48,110.97) 129.6,110.97 130.145,110.425 IC10.2@131.84,110.425
  Bottom Layer w0.5: IC8.1@124.577,110.97 v2(128.48,110.97)
B+: IC6.10 Lepteto_motor.4 | length 17.6
  Top Layer w0.35: 156.035,112.785 156.701,113.451 IC6.10@159.35,113.451
  Top Layer w1.1: Lepteto_motor.4@146.45,111.37 148.59,111.37 150.005,112.785 v2(152.88,112.785)
  Bottom Layer w1.1: Lepteto_motor.4@146.45,111.37 148.59,111.37 150.005,112.785 v2(152.88,112.785)
  other v2: 150.63,112.785
B-: IC6.8 Lepteto_motor.3 | length 20.2
  Top Layer w0.35: v2@153.18,114.48 154.3,114.48 154.571,114.751 IC6.8@159.35,114.751
  Top Layer w1.1: Lepteto_motor.3@146.45,113.91 148.47,113.91 148.99,114.43 v2(153.18,114.43)
  Bottom Layer w1.1: Lepteto_motor.3@146.45,113.91 148.47,113.91 148.99,114.43 v2(153.18,114.43)
  other v2: 149.77,114.43
FEHER: Balancer.3 R8.2 | length 10.5
  Top Layer w0.8: v2(137.618,66.872) R8.2@139.292,66.872
  Bottom Layer w0.8: Balancer.3@128.8,66.89 v2@137.6,66.89
FEKETE: Balancer.4 R9.1 R11.1 R13.1 | length 30.5
  Top Layer w0.8: R13.1@132.67,60.39 131.3,61.76 131.3,66.93 Balancer.4@128.8,69.43 ; R11.1@135.97,65.68 134.34,65.68 130.59,69.43 Balancer.4@128.8,69.43 ; R9.1@139.32,70.9 130.27,70.9 Balancer.4@128.8,69.43